# Altium PCB main.PcbDoc
Units mil, origin at the board's own origin, x right, y up, seen from the top; angles counter-clockwise.
Board outline 2345 x 2725 mil, 2 copper layers (Top Layer, Bottom Layer); 46 components, 39 nets, 214 pads, 106 vias.
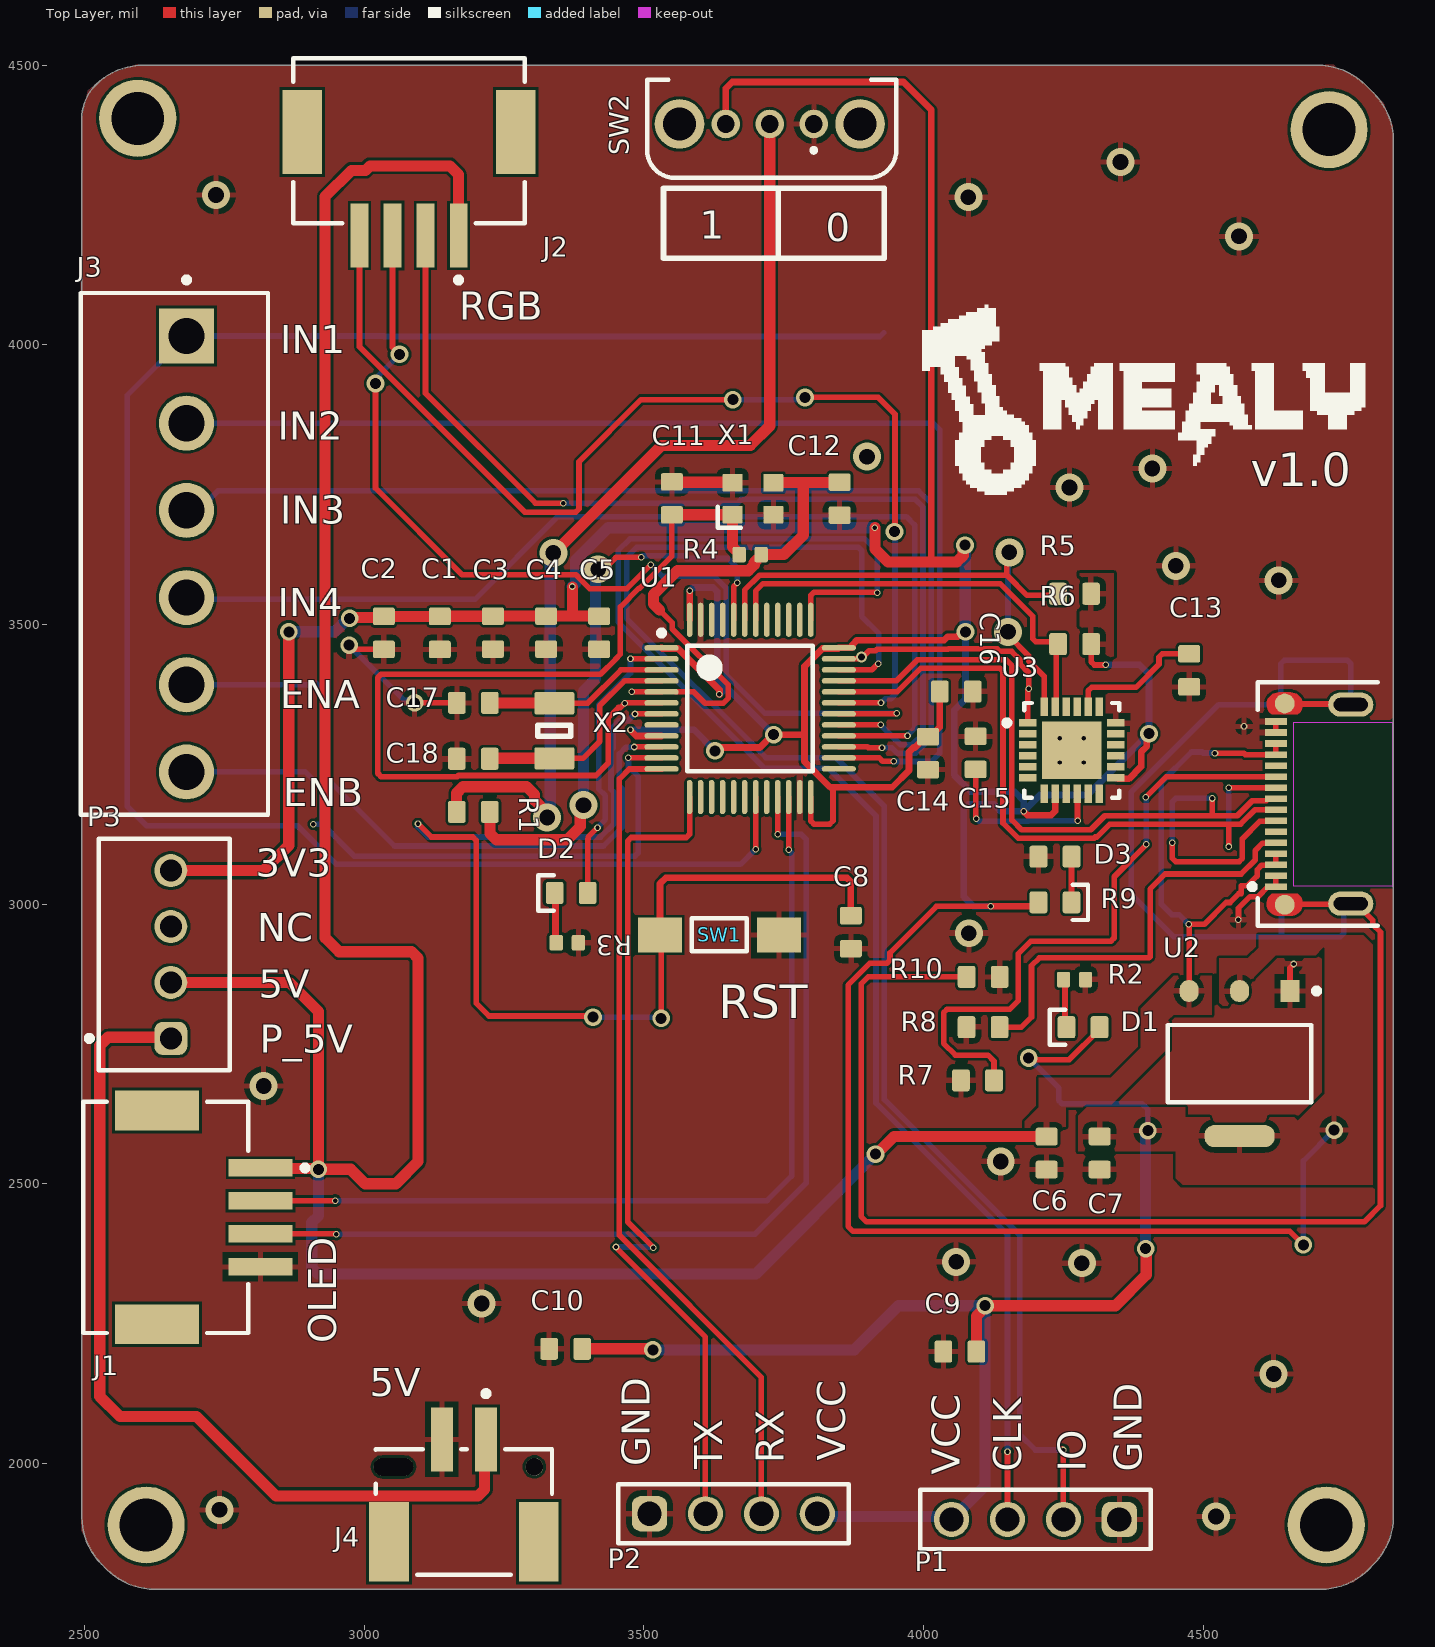
[diagram p0: Top Layer view]
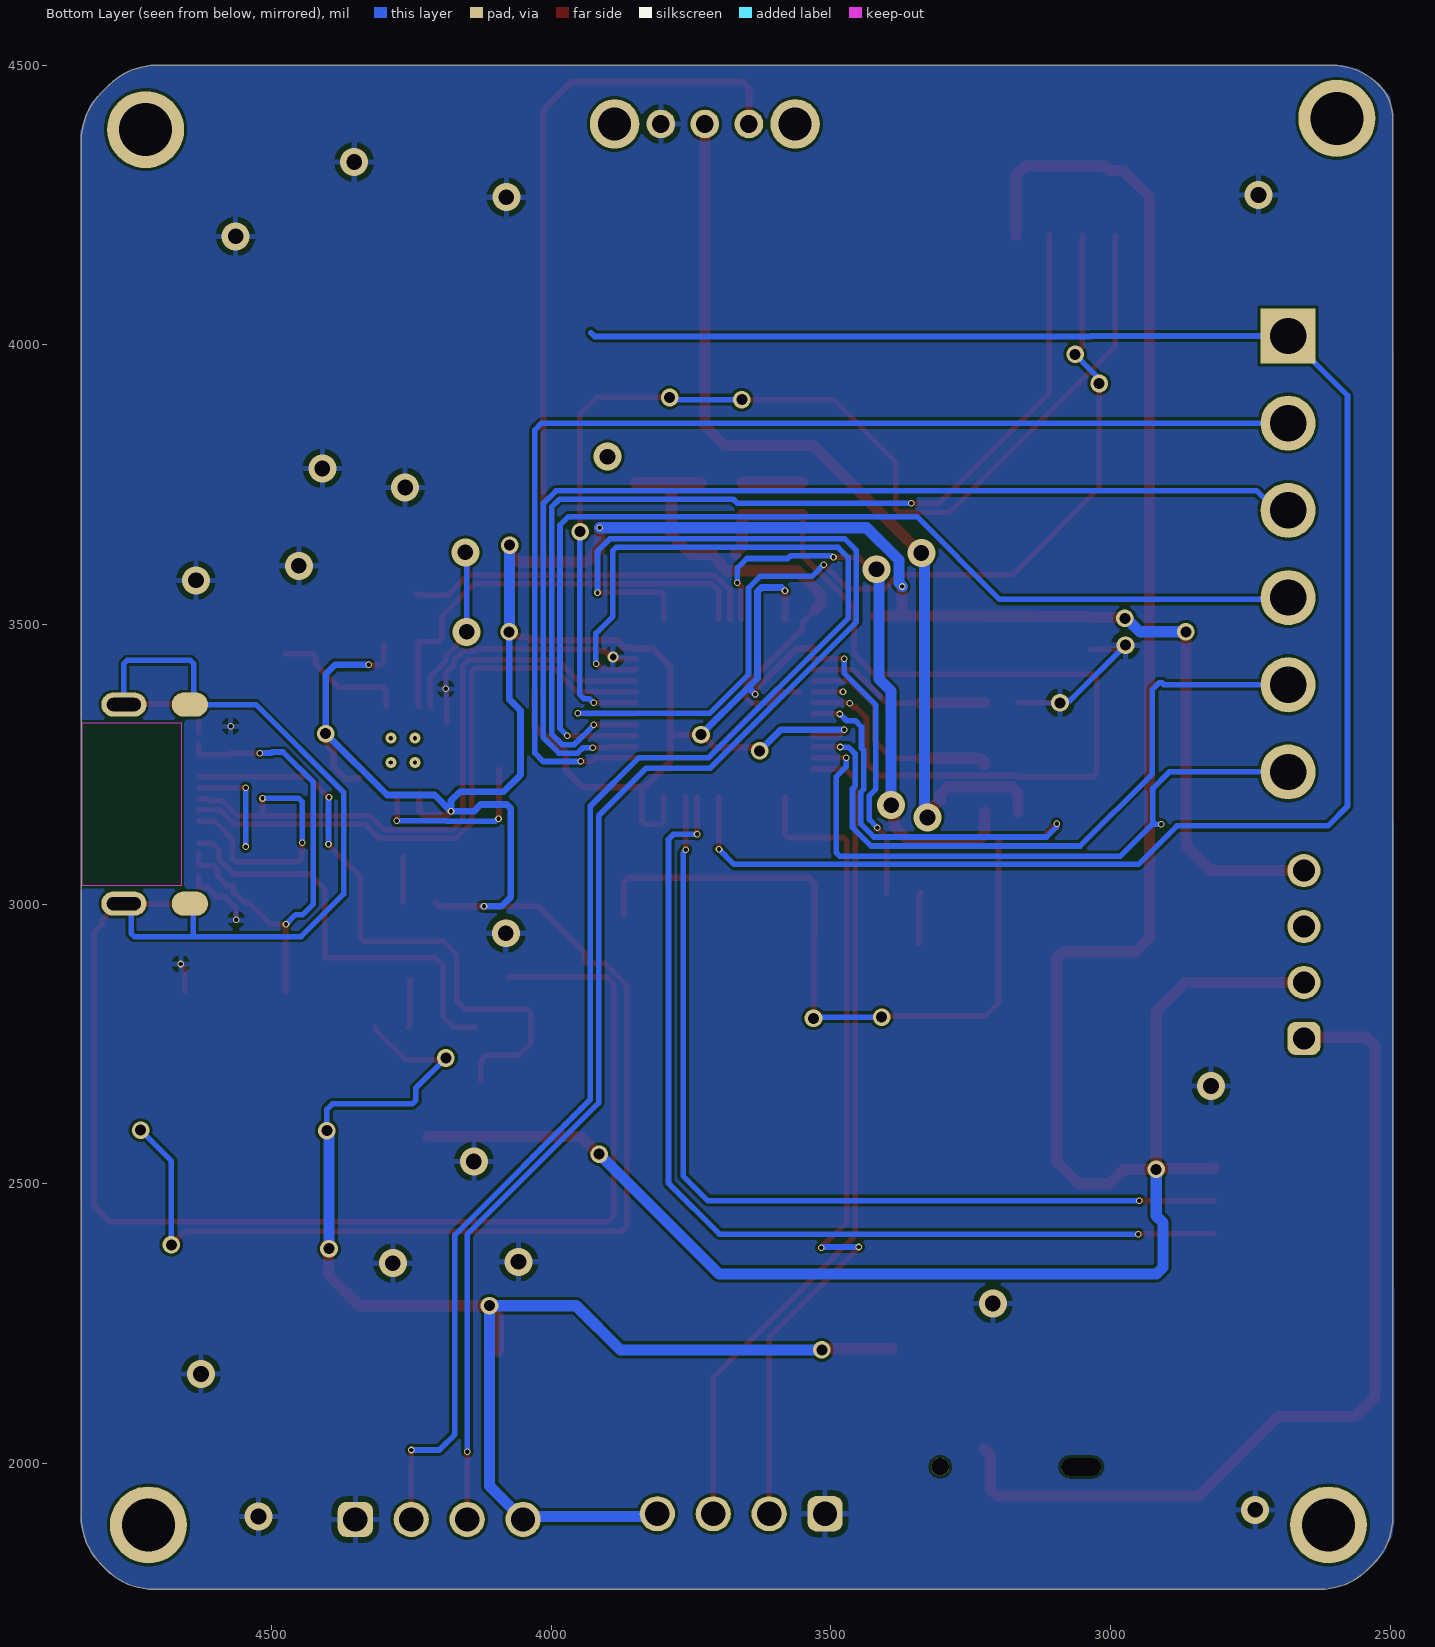
[diagram p1: Bottom Layer view, seen from below]
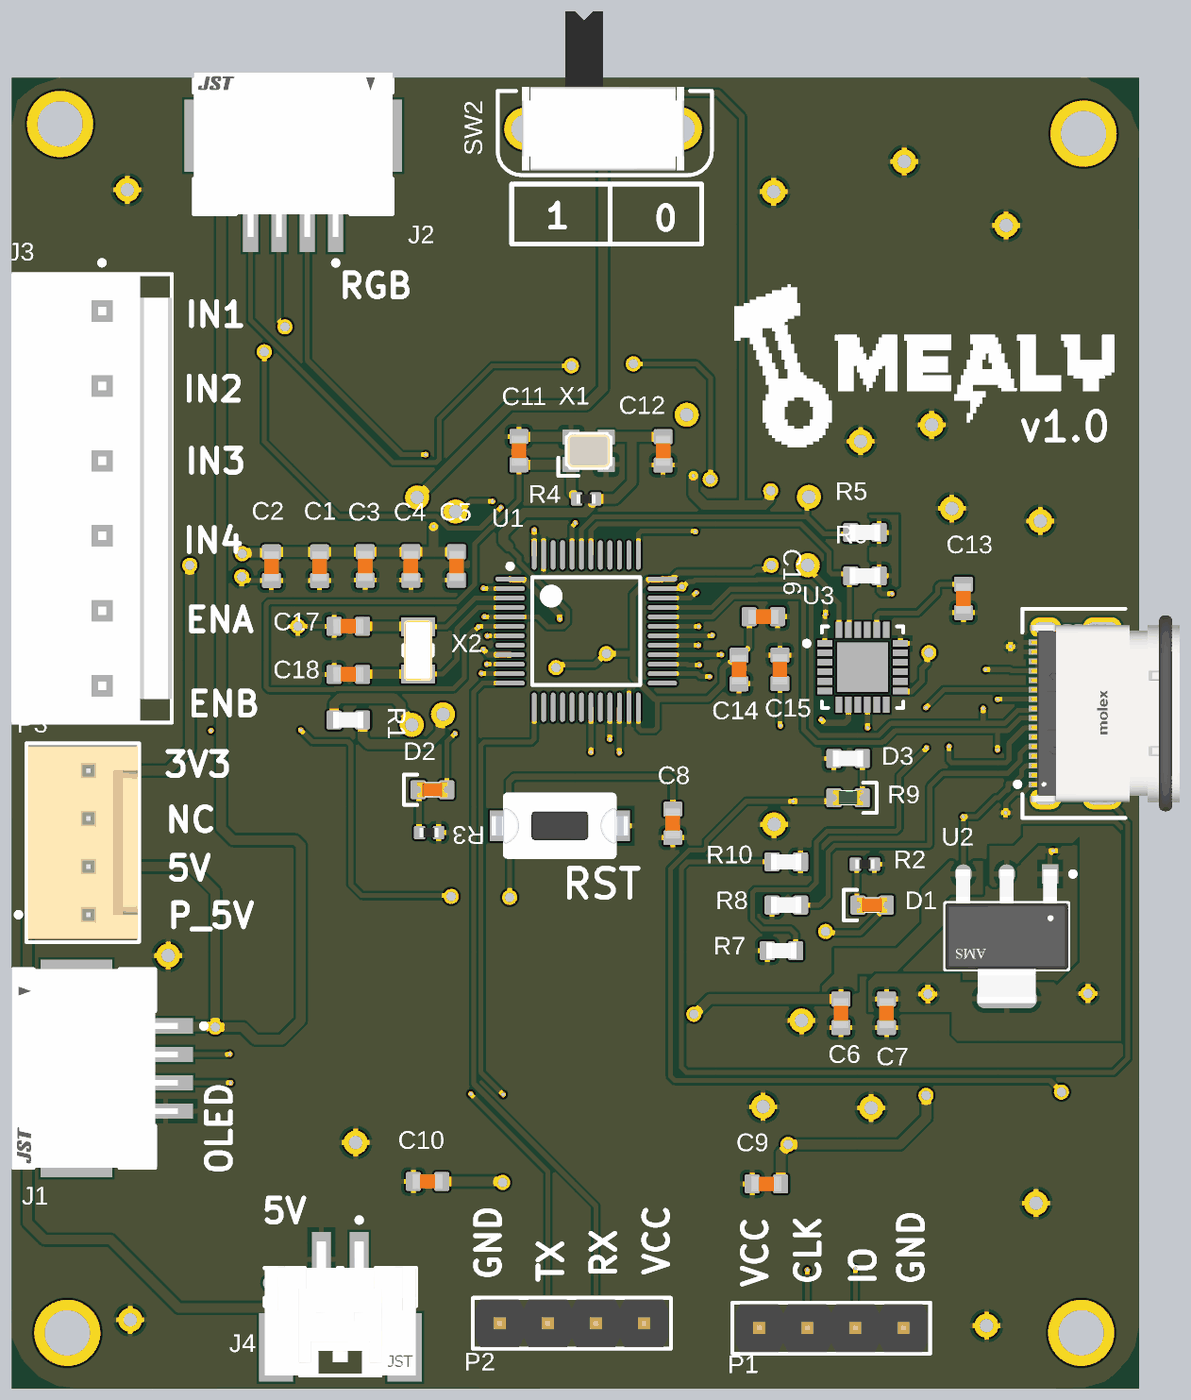
[diagram p2: 3D render of the assembled board from above, using the file's embedded part models]

## Layer stack, top to bottom
Top Solder: solder mask 0.4, Solder Resist, Dk 3.5
Top Layer: signal copper 1.4
Dielectric 1: dielectric 12.6, FR-4, Dk 4.8
Bottom Layer: signal copper 1.4
Bottom Solder: solder mask 0.4, Solder Resist, Dk 3.5

## Board outline
2530,1820 cw(c2614.5,1904.5) 2495,1904.5 2495,4404.64 cw(c2580.36,4404.64) 2520,4465 cw(c2604.5,4380.5) 2604.5,4500 4705,4500 cw(c4705,4379.29) 4790.36,4464.64 4804.64,4450.36 cw(c4719.29,4365) 4840,4365 4840,1905 cw(c4719.29,1905) 4804.64,1819.64 4795,1810 cw(c4710.5,1894.5) 4710.5,1775 2625,1775 cw(c2625,1895.71) 2539.64,1810.36

## Design rules (kind name [scope] priority, off if disabled: settings)
Clearance [All] p1: gap=5 ignorepadtopadclearanceinfootprint=FALSE
PolygonConnect [All] p1: connectstyle=Relief reliefconductorwidth=10 reliefentries=4 polygonreliefangle="90 Angle" airgapwidth=10
RoutingVias [All] p1: holewidth=19.68 width=31.5 viastyle="Through Hole" minholewidth=7.87 minwidth=11.81 maxholewidth=78.74 maxwidth=78.74
SolderMaskExpansion [All] p1: expansion=4 istentingtop=FALSE
Width power [All] p1: maxlimit=20 minlimit=10 preferedwidth=20 minimp=50.000000 maximp=50.000000 favimp=50.000000
Width [All] p2: maxlimit=10 minlimit=5 preferedwidth=10 minimp=50.000000 maximp=50.000000 favimp=50.000000
30 further rules are at their usual default settings.

## Components (designator, comment, footprint, x,y, rotation, side; value= is the part's Value field where it differs from the comment)
C1 "100nF" CAP_0603 3135,3485 r90 top
C2 "100nF" CAP_0603 3035,3485 r90 top
C3 "100nF" CAP_0603 3230,3485.47 r90 top
C4 "100nF" CAP_0603 3325,3485.47 r90 top
C5 "100nF" CAP_0603 3420,3485.47 r90 top
C6 "1uF" CAP_0603 4220,2555 r90 top
C7 "10uF" CAP_0603 4315,2555 r90 top
C8 "100nF" CAP_0603 3870,2950 r90 top
C9 "100nF" CAP_0603 4065,2200 r0 top
C10 "100nF" CAP_0603 3360,2205 r0 top
C11 "10pF" CAP_0603 3550,3725.47 r270 top
C12 "10pF" CAP_0603 3850,3725 r90 top
C13 "2200pF" CAP_0603 4475,3418 r90 top
C14 "0.01uF" CAP_0603 4008.08,3270 r90 top
C15 "0.1uF" CAP_0603 4093.08,3270.47 r270 top
C16 "0.1uF" CAP_0603 4058.55,3380 r180 top
C17 "10pF" CAP_0603 3195,3360 r0 top
C18 "10pF" CAP_0603 3195,3260 r0 top
D1 "RED" LED_0603_RED 4285,2780 r0 top
D2 "RED" LED_0603_RED 3370,3020 r0 top
D3 "GREEN" LED_0603_GREEN 4235,3003.14 r180 top
J1 "OLED" FP-SM04B-ZESS-TB_LF_SN-MFG 2645,2440 r270 top
J2 "RGB" FP-SM04B-ZESS-TB_LF_SN-MFG 3080,4365 r180 top
J3 "MOTOR_DRIVER" FP-B6P-VH_LF_SN-MFG 2660.54,3626.14 r270 top
J4 "POWER" FP-BM02B-PASS-1-TFT_LF_S-MFG 3178.14,1913.15 r0 top
P1 "61300411121" 61300411121 4200,1900 r180 top
P2 "61300411121" 61300411121 3660,1910 r0 top
P3 "61900411121" 61900411121 2642.19,2910 r270 top
R1 "100K" RES_0603 3195,3165 r180 top
R2 "R0402" RES_0402 4270,2865 r180 top
R3 "R0402" RES_0402 3363,2931 r180 top
R4 "1M" RES_0402 3690,3625 r180 top
R5 "4.7K" RES_0603 4270,3555 r0 top
R6 "4.7K" RES_0603 4270,3465 r0 top
R7 "5.1K" RES_0603 4096.38,2685 r0 top
R8 "5.1K" RES_0603 4106.38,2780 r0 top
R9 "4.7K" RES_0603 4235,3085 r0 top
R10 "1M" RES_0603 4106.38,2870 r180 top
SW1 "DTSM-3" DTSM-3 3635,2945 r180 top
SW2 "OS102011MA1QN1" OS102011MA1QN1 3725,4395 r180 top
U1 "STM32F103C8T6" STM-LQFP48_L 3690,3350 r0 top
U2 "AMS1117-3.3" FP-AMS1117-IPC_C 4565,2715 r270 top
U3 "MPU-6050" IS-QFN-24_V 4265,3275 r0 top
X1 "8MHz" XTAL_2520 3695,3725 r0 top
X2 "32.768k" XTAL_3215-2 3340,3310 r270 top
? "213083-0005" FP-2130830005-MFG 4769.76,3178.9 r90 top

## Footprints (in the part's own frame and the unit in brackets; to place one, negate y for a bottom-side part, rotate by r counter-clockwise, add the part's x,y. Pads: shape width x height; smd on the part's side, far side on the other; paste and mask are expansions set on the pad)
61300411121 [mm] "Pin Header, pitch 2.54 mm, THT, Vertical, single row, 4p"
  rrect50% 1.6x1.6 hole 1.1: 1(-3.81,0)
  round 1.6 hole 1.1: 2(-1.27,0) 3(1.27,0) 4(3.81,0)
  silkscreen extent -5.23,-1.35 5.23,1.35, body extent -5.08,-1.27 5.08,1.27, height 8.57
61900411121 [mm] "2.54mm Male Locking Header, 4p"
  rrect50% 1.5x1.5 hole 1: 1(3.81,0.3)
  round 1.5 hole 1: 2(1.27,0.3) 3(-1.27,0.3) 4(-3.81,0.3)
  silkscreen extent -5.25,-3.52 5.25,2.98, body extent -5.08,-2.9 5.08,2.9, height 11.53
CAP_0603 [mm]
  rrect25% 0.8x1 smd: 1(-0.75,0) 2(0.75,0)
  body extent -0.8,-0.4 0.8,0.4, height 0.51
DTSM-3 [mm]
  rect 2x1.6 smd: 1(-2.7,0) 2(2.7,0)
  silkscreen extent -1.25,-0.75 1.25,0.75, body extent -3.6,-1.75 3.6,1.75, height 4.96
FP-2130830005-MFG [mm]
  round 0.9 smd paste-1000 mask+0: 1(-4.57,3.15) 2(4.57,3.15)
  rrect100% 1.1x1.65 smd far side paste-1000 mask+0: 1(-4.52,3.15) 2(4.52,3.15)
  rrect100% 1.1x2.05 hole 1.55 slot 0.6 at 0 deg paste-1000 mask+0: 3(-4.52,0.15) 4(4.52,0.15)
  rect 0.3x1 smd paste+0 mask+0: A1(-3.75,3.55) A4(-2.75,3.55) A5(-1.75,3.55) A6(-0.75,3.55) A7(0.75,3.55) A8(1.75,3.55) A9(2.75,3.55) A12(3.75,3.55) B1(3.25,3.55) B4(2.25,3.55) B5(1.25,3.55) B6(0.25,3.55) B7(-0.25,3.55) B8(-1.25,3.55) B9(-2.25,3.55) B12(-3.25,3.55)
  Top Layer region: 5.07,3.425 5.001,3.691 4.812,3.891 4.549,3.974 4.28,3.919 4.07,3.741 4.07,3.741 4.07,2.559 4.28,2.381 4.549,2.326 4.812,2.409 5.001,2.609 5.07,2.875 5.07,2.875
  Top Layer region: -5.07,3.425 -5.001,3.691 -4.812,3.891 -4.549,3.974 -4.28,3.919 -4.07,3.741 -4.07,3.741 -4.07,2.559 -4.28,2.381 -4.549,2.326 -4.812,2.409 -5.001,2.609 -5.07,2.875 -5.07,2.875
  Keep-Out Layer region: -3.7,-1.745 3.7,-1.745 3.7,2.755 -3.7,2.755
  silkscreen extent -5.53,-1.07 5.53,4.75, body extent -5.33,-4.18 5.33,4.18, height 0.25
FP-AMS1117-IPC_C [mm]
  rect 1.004x0.872 smd paste+0 mask+0: 1(-3.295,2.29)
  rrect100% 1.004x0.872 smd paste+0 mask+0: 2(-3.295,0) 3(-3.295,-2.29)
  rrect87% 1.004x3.182 smd paste+0 mask+0: 4(3.295,0)
  silkscreen extent -3.42,-3.25 1.75,3.63, body extent -3.9,-3.35 3.9,3.35, height 0.25
FP-B6P-VH_LF_SN-MFG [mm]
  rect 2.5x2.5 hole 1.65 paste-1000 mask+0: 1(-9.9,0.55)
  round 2.5 hole 1.65 paste-1000 mask+0: 2(-5.94,0.55) 3(-1.98,0.55) 4(1.98,0.55) 5(5.94,0.55) 6(9.9,0.55)
  silkscreen extent -12.57,-4.25 11.85,4.25, body extent -11.95,-4.35 11.95,4.35, height 0.25
FP-BM02B-PASS-1-TFT_LF_S-MFG [mm]
  rect 1x2.9 smd paste+0 mask+0: 1(1,3.3) 2(-1,3.3)
  rect 1.8x3.6 smd paste+0 mask+0: 3(-3.4,-1.35) 4(3.4,-1.35)
  rrect100% 1.8x0.8 hole 0.8 slot 1.8 at 0 deg unplated paste-1000 mask+0: ""(-3.2,2.05)
  round 0.8 hole 0.8 unplated paste-1000 mask+0: ""(3.2,2.05)
  silkscreen extent -4,-2.85 4,5.5, body extent -4.4,-3.25 4.4,4.85, height 0.25
FP-SM04B-ZESS-TB_LF_SN-MFG [mm]
  rect 0.8x2.9 smd paste+0 mask+0: 1(-2.25,4.3) 2(-0.75,4.3) 3(0.75,4.3) 4(2.25,4.3)
  rect 1.8x3.8 smd paste+0 mask+0: 5(-4.85,-0.4) 6(4.85,-0.4)
  silkscreen extent -5.25,-3.75 5.25,6.45, body extent -5.85,-3.85 5.85,5.85, height 0.25
IS-QFN-24_V [mm] "QFN, 24-Leads, Body 4x4mm, Pitch 0.5mm, Thermal Pad 2.7x2.6mm"
  rect 0.8x0.35 smd: 1(-2,1.25) 2(-2,0.75) 3(-2,0.25) 4(-2,-0.25) 5(-2,-0.75) 6(-2,-1.25) 13(2,-1.25) 14(2,-0.75) 15(2,-0.25) 16(2,0.25) 17(2,0.75) 18(2,1.25)
  rect 0.35x0.85 smd mask+0.102: 7(-1.25,-1.975) 8(-0.75,-1.975) 9(-0.25,-1.975) 10(0.25,-1.975) 11(0.75,-1.975) 12(1.25,-1.975) 19(1.25,1.975) 20(0.75,1.975) 21(0.25,1.975) 22(-0.25,1.975) 23(-0.75,1.975) 24(-1.25,1.975)
  rect 2.7x2.6 smd: 25(0,0)
  silkscreen extent -3.07,-2.15 2.15,2.15, body extent -2,-2 2,2, height 0.95
LED_0603_GREEN [mm]
  rrect25% 0.8x1 smd: A(0.75,0) K(-0.75,0)
  silkscreen extent -1.5,-0.8 -0.8,0.8, body extent -0.8,-0.4 0.8,0.4, height 0.6
LED_0603_RED [mm]
  rrect25% 0.8x1 smd: A(0.75,0) K(-0.75,0)
  silkscreen extent -1.5,-0.8 -0.8,0.8, body extent -0.8,-0.4 0.8,0.4, height 0.6
OS102011MA1QN1 [mm]
  round 1.3 hole 0.8: 1(-2,0) 2(0,0) 3(2,0)
  round 2.25 hole 1.5: MH(-4.1,0) MH(4.1,0)
  silkscreen extent -5.75,-2 5.57,2.45, body extent -4.3,-6.22 4.3,2.18, height 4.59
RES_0402 [mm]
  rrect25% 0.6x0.7 smd: 1(-0.5,0) 2(0.5,0)
  body extent -0.5,-0.25 0.5,0.25, height 0.3
RES_0603 [mm]
  rrect25% 0.8x1 smd: 1(-0.75,0) 2(0.75,0)
  body extent -0.8,-0.43 0.8,0.43, height 0.52
STM-LQFP48_L [mm] "QFP, 48-Leads, Body 7x7mm, Pitch 0.5mm, IPC High Density"
  oval 1.55x0.25 smd: 1(-4.025,2.75) 2(-4.025,2.25) 3(-4.025,1.75) 4(-4.025,1.25) 5(-4.025,0.75) 6(-4.025,0.25) 7(-4.025,-0.25) 9(-4.025,-1.25) 10(-4.025,-1.75) 11(-4.025,-2.25) 12(-4.025,-2.75) 25(4.025,-2.75) 26(4.025,-2.25) 27(4.025,-1.75) 28(4.025,-1.25) 29(4.025,-0.75) 30(4.025,-0.25) 31(4.025,0.25) 32(4.025,0.75) 33(4.025,1.25) 34(4.025,1.75) 35(4.025,2.25) 36(4.025,2.75) ""(-4.025,-0.75)
  oval 0.25x1.55 smd: 13(-2.75,-4.025) 14(-2.25,-4.025) 15(-1.75,-4.025) 16(-1.25,-4.025) 17(-0.75,-4.025) 18(-0.25,-4.025) 19(0.25,-4.025) 20(0.75,-4.025) 21(1.25,-4.025) 22(1.75,-4.025) 23(2.25,-4.025) 24(2.75,-4.025) 37(2.75,4.025) 38(2.25,4.025) 39(1.75,4.025) 40(1.25,4.025) 41(0.75,4.025) 42(0.25,4.025) 43(-0.25,4.025) 44(-0.75,4.025) 45(-1.25,4.025) 46(-1.75,4.025) 47(-2.25,4.025) 48(-2.75,4.025)
  silkscreen extent -4.15,-2.85 2.85,3.55, body extent -3.5,-3.5 3.5,3.5, height 1.6
XTAL_2520 [mm]
  rrect10% 0.9x0.8 smd mask+0: 1(-0.925,-0.725) 2(0.925,-0.725) 3(0.925,0.725) 4(-0.925,0.725)
  silkscreen extent -1.6,-1.33 -0.54,-0.36, body extent -1.25,-1 1.25,1, height 0.8
XTAL_3215-2 [mm]
  rrect10% 1x1.8 smd: 1(-1.25,0) 2(1.25,0)
  silkscreen extent -0.25,-0.75 0.25,0.75, body extent -1.6,-0.75 1.6,0.75, height 0.91

## Part data
C1 C2 C3 C4 C5 C6 C7 C8 C9 C10 C11 C12 C13 C14 C15 C16 C17 C18: library part CAP_0603, "Capacitor SMD 0603"
D1 D2: library part LED_0603_RED, "LED 0603 RED SMD"
D3: library part LED_0603_GREEN, "LED 0603 GREEN SMD"
J1 J2: library part CMP-17439-000309-1, "CONN HEADER SMD R/A 4POS 1.5MM", Color=Natural, Flammability Rating="UL94 V-0", Max Operating Temperature=85°C, Min Operating Temperature=-25°C, Voltage Rating=100V, Connector Type=Header, Contact Finish - Mating=TIN, Contact Material="Copper Alloy", Contact Plating=Tin, Contact Shape=Rectangular, Contact Type="Outer Shroud Contact", Fastening Type=Ramp, Gender=Male, Insulation Color=Natural, Insulation Material=Nylon, Lead Free="Lead Free", Mount="Surface Mount", Number of Contacts=4, Number of Positions=4, Number of Rows=1, Packaging="Cut Tape", Pitch=0.059inch, REACH SVHC="No SVHC", Series=ZE, Termination=Solder
J3: library part CMP-17439-000380-1, "CONN HEADER VERT 6POS 3.96MM", Color=Natural, Contact Resistance=20mR, Current Rating=10A, Flammability Rating="UL94 V-0", Housing Color=White, Max Operating Temperature=85°C, Max Voltage Rating (AC)=250V, Min Operating Temperature=-25°C, Connector Type=Header, Contact Finish - Mating=TIN, Contact Material=Brass, Contact Mating Length=0.303inch, Contact Plating=Copper, Contact Shape=Square, Contact Type="Male Pin", Depth=8.5mm, Fastening Type=Ramp, Gender=Male, Height=8.5mm, Housing Material=Polyamide, Insulation Color=Natural, Insulation Material=Nylon, Lead Free="Lead Free", Length=23.7mm, Mated Stacking Heights=16.5mm, Max Current Rating=10A, Mount="Through Hole", Number of Contacts=6, Number of Pins=6, Number of Positions=6, Number of Rows=1, Orientation=Straight, Packaging=Bulk, Pitch=3.96mm, REACH SVHC="No SVHC", Series=VH, Termination=Solder, Voltage Rating=250V, Width=14.6mm
J4: library part CMP-17439-000073-1, "CONN HEADER SMD 2POS 2MM", Color=Natural, Connector Type="Male Pin", Contact Material=Copper, Contact Plating=Tin, Contact Type="Male Pin", Fastening Type=Ramp, Gender=Male, Lead Free="Lead Free", Mount="Surface Mount", Number of Contacts=2, Number of Positions=2, Number of Rows=1, Packaging="Tape and Reel", Pitch=0.079inch, Series=PA, Termination=Solder
P1 P2: library part CMP-1502-01064-2, Color=Black, Contact Resistance=20mΩ, Current Rating=3A, Max Operating Temperature=105°C, Min Operating Temperature=-40°C, Operating Supply Voltage=250V, Connector Type="Male Pin", Contact Material=Copper, Contact Mating Length=5.9944mm, Contact Plating=Gold, Gender=Male, Height=8.89mm, Lead Free="Lead Free", Lead Pitch=2.54mm, Mount="Through Hole", NexarPartId=32855522, Number of Contacts=4, Number of Pins=4, Number of Positions=4, Number of Rows=1, Orientation=Vertical, Packaging=Bulk, Pitch=2.54mm, REACH SVHC=Unknown, RoHS=Compliant, Termination=Solder, Voltage Rating=250V
P3: library part CMP-1502-00586-2, Color=Beige, Contact Resistance=20mΩ, Current Rating=3A, Flammability Rating="UL94 V-0", Insulation Resistance=1GΩ, Max Operating Temperature=105°C, Min Operating Temperature=-40°C, Operating Supply Voltage=250V, Connector Type="Male Pin", Contact Gender=Male, Contact Material=Copper, Contact Mating Length=7.493mm, Contact Plating=Tin, Fastening Type=Friction, Gender=Male, Height=3.3mm, Housing Material=Nylon, Insulation=Insulated, Lead Free="Lead Free", Lead Pitch=2.54mm, Length=10.16mm, Mount="Through Hole", NexarPartId=18818226, Number of Contacts=4, Number of Pins=4, Number of Positions=4, Number of Rows=1, Orientation=Vertical, Packaging=Bulk, Pitch=2.54mm, REACH SVHC=Unknown, RoHS=Compliant, Termination="Through Hole", Voltage Rating=250V, Width=10.2mm
R1 R5 R6 R7 R8 R9 R10: library part RES_0603, "Resistor SMD 0603"
R2 R3 R4: library part RES_0402, "Resistor SMD 0402"
SW1: "Tactile Switch SMD SPST", Manufacturer=Diptronics, Manufacturer Part Number=DTSM-3
SW2: "Slide Switch SPDT Horizontal THT", Manufacturer=C&K, Manufacturer Part Number=OS102011MA1QN1
U1: library part CMP-0237-00215-3, "ARM Cortex-M3 32-bit MCU, 64 KB Flash, 20 KB Internal RAM, 37 I/Os, 48-pin LQFP, -40 to 85 degC, Tray", I/Os (High Current)=37, Operating Frequency(F) (Processor speed) (MHz)=72, Supply Voltage(Vcc) min (V)=2, A/D Converter="2x12-bit (10 Channel)", ComponentLink1Description="Manufacturer URL", ComponentLink1URL=http://www.st.com/web/en/home.html, ComponentLink2Description=Datasheet, ComponentLink2URL=http://www.st.com/st-web-ui/static/active/en/resource/technical/document/datasheet/CD00161566.pdf, ComponentLink3Description="Package Specification", ComponentLink3URL=http://www.st.com/st-web-ui/static/active/en/resource/technical/document/datasheet/DM00058181.pdf, Core="ARM Cortex-M3", DatasheetVersion="Rev. 16", FLASH Size (Prog) (kB)=64, Internal RAM Size (kB)=20, Mounting Technology="Surface Mount", PackageDescription="48-Pin Low Profile Quad Flat Package, 7 x 7 mm Body, 0.5 mm Pitch", PackageReference=LQFP48, PackageVersion="Rev. 6, 06/2013", Packing=Tray, PartNumber=STM32F103C8T6
U2: library part CMP-209535-000001-1, "LDO Voltage Regulators 1A, 3.3V", Dropout Voltage=1.1V, Manufacturer="Advanced Monolithic Systems", Max Junction Temp=+125°C, Max Power Dissipation=1.2W, Max Supply Voltage=15V, Nominal Supply Current=5mA, Output Current=1A, Output Voltage=3.3V, Package=AMS1117, Temperature="-40°C to +125°C", Temperature Range Low=-40°C, Automotive=No, Category=IC, ComponentLink2Description=Datasheet, ComponentLink2URL=http://www.advanced-monolithic.com/pdf/ds1117.pdf, Device Class L1="Integrated Circuits (ICs)", Device Class L2="Power Management ICs", Device Class L3="Voltage Regulators - Linear", Height=1.8mm, Ipc Land Pattern Name=SOT229P700X180-4, Lead Free=Yes, Manufacturer Part Number=AMS1117-3.3, Number Of Outputs=1, Octopart=https://octopart.com/ams1117-3.3-advanced+monolithic+systems-25899300, Output Type=Fixed, RoHS=TRUE, Standoff Height=0.64mm, Temperature Range High=+125°C
U3: library part CMP-1753-00002-2, "3-Axis Gyroscope, Accelerometer and a Digital Motion Processor(TM) (DMP), 2.375 to 3.46 V, -40 to 85 degC, 24-Pin QFN, RoHS, Tape and Reel", Manufacturer=InvenSense, Standard Package=5,000, Category=Sensors,Transducers, Datasheet URL=http://datasheet.octopart.com/MPU-6050-InvenSense-datasheet-14421344.pdf, Datasheet Version="Rev. 3.3, 05/2012", Dynamic Catalog=MPU-6000™Series, Family=Multifunction, Featured Product=MPU-60506-Axis,IntegratedI²CSolution, Manufacturer URL=http://www.invensense.com/, Online Catalog=MPU-6000™Series, Other Names="1428-1007-2 / MPU6050", Output Type=Digital, Sensor Type=MotionTracking, Unit PriceUSD=Digital
X1: library part XTAL_2520, "Crystal SMD 2520"
X2: library part XTAL_3215, "Crystal SMD 3215"
?: library part CMP-04767-000030-2, "CONN RCP USB2.0 TYP C 24P SMD RA", Current Rating=5A, Max Operating Temperature=85°C, Min Operating Temperature=-40°C, Voltage Rating=30V, Contact Material="Gold, Nickel", Country of Origin=CN, Gender=Receptacle, NexarPartId=114105384, Number of Contacts=16, Schedule B="8536695050, 8536695050", USB Standard="USB 2.0"

## Free pads (board coordinates)
  round 137.8 hole 94.49: 1(2595,4405) 2(4725,4385) 3(4720,1890) 4(2610,1890)

## Via types
v1: diameter 11.81, hole 7.87, Top Layer to Bottom Layer, 52 vias
v2: diameter 31.5, hole 19.68, Top Layer to Bottom Layer, 25 vias
v3: diameter 50, hole 28, Top Layer to Bottom Layer, 24 vias
v4: diameter 19.68, hole 7.87, Top Layer to Bottom Layer, 4 vias
v5: diameter 19.68, hole 11.81, Top Layer to Bottom Layer, 1 vias

## Nets (pads, with @x,y where several pads share a name; then routed paths per layer and width w, separated by ;. In a path a pad name is that pad's centre, name@x,y a point inside that pad or via, vN(x,y) a via of type N, cw(c..) or ccw(c..) an arc to the next point about the centre after c; other vN are vias at no path point)
3V3: C1.2 C2.2 C3.2 C4.2 C5.2 C7.2 C9.2 C10.2 C14.2 C16.2 D1.A D3.A P1.4 P2.4 P3.4 R5.2 R6.2 SW2.3 U1.1 U1.9 U1.24 U1.36 U1.48 U2.2 U2.4 U3.8 U3.13 | length 11418.8
  Top Layer w10: P3.4 P3.4@2662,3068 ; v2@2861,3483 v2(2865,3487) ; U1.24 3798.27,3148.86 3804.13,3143 3832.14,3143 3838,3148.86 3838,3204 3843,3209 ; v1(4120,2996) 4023,2996 3940,2913 3940,2899.86 3934.14,2894 3903.69,2894 3865,2855.31 3865,2424 3874,2415 4655,2415 v2(4679,2391) ; v2(4188,2725) 4191,2722 4260.46,2722 4314.53,2776.06 D1.A ; R6.2 4299.53,3433.51 4305.39,3427.65 4325.65,3427.65 v1(4326,3428) ; v2(4734,2596) 4734,2593 v2@4736,2591
  Top Layer w12: v1@3476,3311 3486.21,3300.79 U1.9 ; U1.1 3532.61,3457.19 3561.04,3457.19 3635,3383.22 v1(3635,3375) ; U1.48 v1(3581.73,3560.22) ; v2(3627,3274) 3633,3280 3707.27,3280 3730.27,3303 v2(3732,3303) 3786,3303 3787,3304 ; SW2.3 3646.26,4458.26 3658,4470 3964,4470 4014,4420 4014,3612 4014,3611 ; C16.2 4029.03,3316.54 4012.02,3299.53 C14.2 4004.14,3299.53 3984.62,3280 3982,3280 3974,3272 3974,3239 3944,3209 3843,3209 3833,3209 3787,3255 3787,3304 ; v2(4075,3487) 4069.72,3487 4060.99,3478.27 4043.27,3478.27 4037,3472 3881.08,3472 3872.98,3463.89 3872.98,3459.35 3871.9,3458.27 U1.36 3847.39,3457.19 3818.96,3457.19 3787,3425.22 3787,3304 ; v1(4120,2996) 4198.33,2996 D3.A ; v1(4179,3166) 4186,3159 4228,3159 4235.47,3166.47 U3.8 ; U3.13 4345.21,3225.79 4347,3224 4367,3224 4389,3246 4389,3272 4399.27,3282.27 4399.27,3301.27 v2(4403,3305)
  Top Layer w20: P3.4 2820,3060 2865,3105 v2(2865,3487) ; v2(2974,3511) 2975.76,3512.76 3033.24,3512.76 C2.2 C1.2 3135.24,3514.76 3229.76,3514.76 C3.2 C4.2 3372.5,3515 ; v1@3372.5,3566.5 3372.5,3515 ; C10.2 3514,2205 v2(3516,2203) ; C5.2 3372.5,3515 ; v1(3913,3673) 3913,3635.26 3936.26,3612 4014,3612 4059.28,3612 4071,3623.72 4071,3635.89 4074,3638.89 v2(4074,3642) ; C9.2 4094.53,2263.42 4110,2278.89 v2(4110,2282) 4343,2282 4398,2337 4398,2383 v2(4397,2384)
  Bottom Layer w10: v2(4188,2725) 4242,2671 4242,2648.86 4247.86,2643 4391,2643 4401,2633 v2(4401,2595) ; v2(4679,2391) 4679,2541 v2(4734,2596)
  Bottom Layer w12: v1(3476,3312) 3589,3312 v2(3627,3274) ; v1(3581.73,3560.22) 3587.51,3566 3623.97,3566 3631,3558.97 3631,3404 3646.5,3388.5 ; v1(3635,3375) 3646.5,3386.5 3646.5,3388.5 ; v2(3732,3303) 3646.5,3388.5 ; v2(4075,3487) 4075,3366.61 4054.75,3346.36 4054.75,3231.25 4085,3201 4163,3201 4179,3185 v1(4179,3166) ; v1@4122,2996 v1(4120,2996) 4089,2996 4072,3013 4072,3170.97 4079.03,3178 4126,3178 4138,3166 v1(4179,3166) ; v1(4326,3428) 4386,3428 4403,3411 v2(4403,3305) 4293,3195 4208,3195 v1(4179,3166)
  Bottom Layer w20: v2(2865,3487) 2946.89,3487 2970.89,3511 v2(2974,3511) ; v1(3372,3568) 3378.12,3574.12 3378.12,3615.35 3435.77,3673 v1(3913,3673) ; v2(3516,2203) 3876,2203 3955,2282 v2(4110,2282) 4110,1960 P1.4 4045,1905 3815,1905 P2.4 ; v2(4074,3642) 4074.5,3641.5 4074.5,3487.5 v2(4075,3487) ; v2(4397,2384) 4397,2587.89 4401,2591.89 v2(4401,2595)
5V: ?.A4 ?.A9 ?.B4 ?.B9 C6.2 J1.1 J2.1 P3.2 U2.3 | length 5609.6
  Top Layer w10: U2.3 4474.84,2962.67 4474,2963.51 v1(4474,2964) 4502,2964 4541,3003 4548,3003 4564,3019 4568,3019 4568,3033 4579,3033 4596.36,3050.36 4596.36,3061.36 4604.72,3069.72 4629.09,3069.72 ?.A4 ?.B9 ; v1(4521,3270) 4572.49,3270 4575.01,3267.48 ?.B4 ?.A9
  Top Layer w20: P3.2 2866,2860 2918,2808 v2(2918,2526) ; J1.1 2815.58,2527.29 2916.71,2527.29 v2(2918,2526) ; J2.1 3168.58,4304.42 3153,4320 3010,4320 3002,4312 2977,4312 2930,4265 2930,2940 2955,2915 3084.28,2915 3096,2903.28 3096,2539.72 3056.28,2500 3001.7,2500 2975.7,2526 v2(2918,2526) ; v2(3914,2553) 3915.64,2553 3947.17,2584.53 C6.2
  Bottom Layer w10: v1(4474,2964) 4456.83,2981.17 4443.83,2981.17 4425,3000 4425,3218 4479,3272 4498.51,3272 4500.16,3270.35 4520.65,3270.35 v1(4521,3270)
  Bottom Layer w20: v2(2918,2526) 2918,2442.8 2906,2430.8 2906,2350.72 2917.72,2339 3700,2339 v2(3914,2553)
BLUE: J2.4 U1.31 | length 2034.4
  Top Layer w10: J2.4 2991.42,3996.58 3287,3701 3378.14,3701 3384,3706.86 3384,3791 3495,3902 v2(3659,3902) ; v2(3788,3906) 3919,3906 3949,3876 3949,3667 v2(3948,3666) ; U1.31 v1(3923.84,3359.84)
  Bottom Layer w10: v2(3659,3902) 3784,3902 v2(3788,3906) ; v1(3923.84,3359.84) 3924.33,3359.84 3931.75,3367.26 3941.26,3367.26 3949,3375 3949,3665 v2(3948,3666)
BOOT0: R1.1 U1.44 | length 1050.9
  Top Layer w10: v3(3418.12,3598.78) 3428.94,3598.78 3450.16,3620 v1(3495,3620) ; U1.44 3660.47,3567.98 3667,3574.51 v1(3667,3575)
  Top Layer w20: R1.1 3224.53,3126.72 3236.24,3115 3362.08,3115 3386.26,3139.18 3386.26,3171.26 v3(3392,3177)
  Bottom Layer w10: v1(3495,3620) 3498,3623 3571.5,3623 3576.5,3618 3650,3618 3667,3601 v1(3667,3575)
  Bottom Layer w20: v3(3392,3177) 3392,3380.88 3413.5,3402.38 3413.5,3594.17 v3(3418.12,3598.78)
DEBUG_RX: P2.3 U1.12 | length 1502.1
  Top Layer w10: U1.12 3473.73,3241.73 3456,3224 3456,2408 3710,2154 P2.3
DEBUG_TX: P2.2 U1.13 | length 1539.4
  Top Layer w10: v1@3449,2387 3610,2226 P2.2 ; v1(3517,2386) 3471,2432 3471,3113 3477.11,3119.11 3575.87,3119.11 3581.73,3124.96 U1.13
  Bottom Layer w10: v1(3450,2387) 3515.51,2387 3516.51,2386 v1(3517,2386)
ENA: J3.5 U1.10 | length 1215.3
  Top Layer w10: v1@3485,3281.1 U1.10
  Bottom Layer w10: J3.5 2904.28,3392.28 2907.86,3395.86 2912.91,3395.86 2925,3383.77 2925,3233 3054,3104 3427.8,3104 3461,3137.2 3461,3206.43 3456.09,3211.33 3456.09,3268.59 3468.16,3280.65 3482.65,3280.65 v1(3483,3281)
ENB: J3.6 U1.11 | length 1157.6
  Top Layer w10: v1@3475.42,3261.42 U1.11
  Bottom Layer w10: J3.6 2894.62,3236.38 2924,3207 2924,3143 v1(2909.09,3143) ; 2925,3143 2982,3086 3484.14,3086 3490,3091.86 3490,3228 3472.35,3245.65 3472.35,3261.65 v1(3472,3262)
GND: ?.A1 ?.A12 ?.B1 ?.B12 C1.1 C2.1 C3.1 C4.1 C5.1 C6.1 C7.1 C8.1 C9.1 C10.1 C11.1 C12.1 C13.1 C14.1 C15.1 C16.1 C17.1 C18.1 J1.4 J4.2 P1.1 P2.1 R2.1 R3.1 R7.1 R8.1 R9.1 R10.1 SW1.1 SW2.1 U1.23 U1.35 U1.47 U2.1 U3.1 U3.18 X1.2 X1.4 | length 1061.7
  Top Layer w10: v2(2973,3463) 2980.53,3455.47 C2.1 ; v2(3090,3360) C17.1 ; U1.35 3848.54,3438.66 3883.04,3438.66 3886.38,3442 v5(3889,3442) 3891.62,3442 3902.62,3453 3914,3453 3917,3456 4043.63,3456 4044.63,3457 4131.5,3457 4136.5,3452 4157.54,3452 4173,3436.54 4173,3428.79 4188,3413.79 v1(4188,3385) 4188,3384.51 4186.26,3382.77 U3.1 ; v1(4563,2972) 4563.12,2972.12 4563.12,2992.91 4583.64,3013.43 4598.39,3013.43 4615.31,3030.35 4629.09,3030.35 ?.A1 ?.B12 ; ?.B1 ?.A12 ; U2.1 4655.16,2886.16 v1@4660,2891
  Top Layer w20: C11.1 3550.73,3754.27 3657.85,3754.27 X1.4
  Bottom Layer w10: v2(2973,3463) 3071.89,3364.11 3085.89,3364.11 v2(3090,3360) v2@3091,3360
  other v1: 4662,2893 4573,3318
  other v3: 4523,1905 2741,1917 4626,2160 3210,2286 4283,2358 4058.19,2360.55 4138,2540 2820,2675 4081,2948 4635,3579 4451,3605 4261,3745 4409,3779 4564,4194 4080,4264 2735,4268 4352,4327
GREEN: J2.3 U1.30 | length 1804.2
  Top Layer w10: v2(3020,3931) 3020,3744 3175,3589 3378.28,3589 3403.5,3563.78 3469.11,3563.78 v1(3512.41,3607.09) ; J2.3 3050.47,3995.53 v2(3063,3983) ; U1.30 3950.67,3340.16 3951.51,3341 v1(3952,3341)
  Bottom Layer w10: v2(3020,3931) 3020,3940 v2(3063,3983) ; v1(3512.41,3607.09) 3533.33,3586.17 3626.43,3586.17 3647,3565.6 3647,3410.63 3716.63,3341 v1(3952,3341)
HSE_IN: C12.2 R4.1 U1.5 X1.3 | length 931
  Top Layer w10: v1(3478,3380) 3478.47,3379.53 U1.5 ; 3528,3526 3550.5,3503.5 3550.5,3492.5 3651,3392 3651,3368.37 3641.63,3359 3609.6,3359 3589.07,3379.53 U1.5@3557.05,3379.53
  Top Layer w20: 3528,3526 3517.28,3536.72 3517.28,3553.28 3560.22,3596.22 3686.61,3596.22 3697.13,3606.74 3697.13,3610.47 3709.68,3623.03 R4.1 3750,3625 3785,3660 3785,3748.33 3790.71,3754.04 ; X1.3 3731.91,3754.04 3790.71,3754.04 ; C12.2 3849.51,3754.04 3790.71,3754.04
HSE_OUT: C11.2 R4.2 U1.6 X1.1 | length 1707
  Top Layer w10: U1.6 3467.24,3359.84 3466.4,3359 v1(3465.91,3359) 3465.42,3359 3458,3351.58 3454.58,3351.58 3436,3333 3436,3252 3414,3230 3168.43,3230 3166.57,3228.14 3029.86,3228.14 3024,3234 3024,3405.14 3029.86,3411 3422.32,3411 3449.76,3438.44 3449.76,3438.76 3458,3447 3458,3531.46 3491.54,3565 3492.82,3565 3550,3622.18 C11.2
  Top Layer w20: C11.2 3550.26,3696.2 3658.33,3696.2 3658.33,3638.96 3670.31,3626.97 R4.2
IN1: J3.1 U1.19 | length 3406.5
  Top Layer w10: v1(3699.84,3098.16) U1.19
  Bottom Layer w10: v1(3699.84,3098.16) 3672.68,3071 2950,3071 2881,3140 2611,3140 2576,3175 2576,3909.71 J3.1 3034.6,4015.91 3035.51,4015 3922,4015 3929,4022
IN2: J3.2 U1.26 | length 2119.2
  Top Layer w10: U1.26 3921.09,3261.42 3926.92,3255.59 3946.45,3255.59 v1(3946.8,3255.24)
  Bottom Layer w10: J3.2 4017,3860 4029,3848 4029,3270 4014,3255 3947.04,3255 v1(3946.8,3255.24)
IN3: J3.3 U1.27 | length 1955.6
  Top Layer w10: U1.27 3899.74,3281.1 3901.2,3279.65 v1(3925.65,3279.65)
  Bottom Layer w10: J3.3 2703.19,3704.09 2738.1,3739 3991.21,3739 4014,3716.21 4014,3298.01 3985.99,3270 3952.73,3270 3943.43,3279.3 3925.99,3279.3 v1(3925.65,3279.65)
IN4: J3.4 U1.28 | length 1875.8
  Top Layer w10: U1.28 3945.33,3300.79 3945.44,3300.91 v1(3971.23,3300.91)
  Bottom Layer w10: J3.4 2685.38,3545 3198,3545 3346,3693 3969,3693 3984,3678 3984,3314.16 3971.23,3301.4 v1(3971.23,3300.91)
LSE_IN: C17.2 U1.3 X2.1 | length 332.1
  Top Layer w10: X2.1 3399.21,3359.21 3458.9,3418.9 U1.3
  Top Layer w20: C17.2 3224.92,3359.61 3339.61,3359.61 X2.1
LSE_OUT: C18.2 U1.4 X2.2 | length 408.6
  Top Layer w10: X2.2 3390.79,3260.79 3421,3291 3421,3355 3465.21,3399.21 U1.4
  Top Layer w20: C18.2@3224.53,3250 3224.53,3253.94 3230.28,3259.69 3234.21,3259.69 3235.32,3260.79 X2.2
MPU_SCL: R6.1 U1.42 U3.23 | length 777.5
  Top Layer w10: U1.42 3699.84,3559.96 3712.89,3573 4137,3573 4195,3515 4195,3474.86 4200.86,3469 4236.47,3469 4237.36,3468.11 4237.36,3354.65 U3.23
MPU_SDA: R5.1 U1.43 U3.24 | length 987.6
  Top Layer w10: U1.43 3680.16,3561.48 3706.67,3588 4149,3588 ; v3(4151,3487) 4151,3481 4188,3444 4188,3435 4215.79,3407.21 U3.24 ; v3(4153.33,3629.14) 4149,3624.81 4149,3588 ; R5.1 4237.47,3552 4185,3552 4149,3588
  Bottom Layer w10: v3(4151,3487) 4151,3626.81 v3(4153.33,3629.14)
Net_1: ?.1 ?.2 ?.3 ?.4 R10.2 | length 3694.1
  Top Layer w10: R10.2 3900.9,2870 3888.25,2857.35 3888.25,2441.86 3898.11,2432 4788,2432 4817,2461 4817,2950 4803,2964 4803,2971.49 4773.55,3000.94 ?.3 4762.87,2999.96 4646.73,2999.96 ?.1@4645.75,2998.98 ; ?.2@4645.75,3358.82 4646.73,3357.83 4762.87,3357.83 ?.4
  Bottom Layer w10: ?.1@4645.75,3000.94 4640,2995.2 4640,2942 ; ?.3 4751,2988.09 4751,2947.86 4745.14,2942 4640,2942 ; ?.4 4763.86,3430.14 4758,3436 4644.86,3436 4639,3430.14 4639,3363.6 4645.75,3356.85 4527.85,3356.85 4371,3200 4371,3018 4447,2942 4640,2942
Net_A5: ?.A5 R8.2 | length 765.4
  Top Layer w10: R8.2 4175,2780 4193,2798 4193,2890 4207,2904 4403,2904 4405,2906 4405,3027 4432,3054 4567.79,3054 4593,3079.21 4593,3096 4606.09,3109.09 4629.09,3109.09 ?.A5
Net_B5: ?.B5 R7.2 | length 1123.1
  Top Layer w10: R7.2 4125.91,2719.09 4115,2730 4057,2730 4036,2751 4036,2806.14 4041.86,2812 4154,2812 4169,2827 4169,2911 4192,2934 4335.14,2934 4341,2939.86 4341,3049 v1@4397,3105 ; v1(4397,3191) 4434.11,3228.11 ?.B5
  Bottom Layer w10: v1(4397,3191) 4397,3190.51 4398,3189.51 v1(4398,3107)
NetC13_2: C13.2 U3.20 | length 244.1
  Top Layer w10: U3.20 4294.53,3381.67 4300.39,3387.53 4379.53,3387.53 4421,3429 4421,3441.67 4426.86,3447.53 C13.2
NetC15_2: C15.2 U3.10 | length 319.9
  Top Layer w10: v1@4093.08,3153.86 C15.2 ; U3.10 4275.31,3196.78 4275.31,3149.25 v1(4275.65,3148.91)
  Bottom Layer w10: v1(4094,3153) 4094.49,3153 4099.49,3148 4186.87,3148 4187.78,3148.91 v1(4275.65,3148.91)
NetD1_K: D1.K R2.2 | length 87.1
  Top Layer w10: R2.2 4252.89,2862.42 4252.89,2782.58 D1.K
NetD2_K: D2.K R3.2 | length 90.2
  Top Layer w12: D2.K 3341.89,3018.58 3341.89,2932.42 R3.2
NetD3_K: D3.K R9.2 | length 81.9
  Top Layer w10: D3.K R9.2
NetR1_2: R1.2 SW2.2 | length 1732.3
  Top Layer w20: R1.2 3165,3165.47 3165,3198.28 3176.72,3210 3290.08,3210 3304.22,3195.86 3304.22,3185.9 3327,3163.12 v3(3327,3155) ; v3(3338,3628) 3339.28,3628 3531.28,3820 3690,3820 3725,3855 SW2.2
  Bottom Layer w20: v3(3327,3155) 3332.5,3160.5 3332.5,3622.5 v3(3338,3628)
nRST: C8.2 SW1.2 U1.7 | length 2048.4
  Top Layer w10: v1(3096,3144) 3120,3120 3194.14,3120 3200,3114.14 3200,2823 3223,2800 3407,2800 v2(3409,2798) ; v1@3483,3340 3483.16,3340.16 U1.7 ; SW1.2 3530.69,2943.01 v2(3530.69,2795.96)
  Top Layer w12: SW1.2 3528.7,3036.7 3539,3047 3862.97,3047 3870,3039.97 C8.2
  Bottom Layer w10: v1@3096,3145 v1(3096,3144) 3096,3138 3114,3120 3422.59,3120 3446,3143.41 3446,3200.21 3441.09,3205.12 3441.09,3274.8 3445,3278.71 3445,3317 3455.91,3327.91 3471.42,3327.91 3483.51,3340 v1(3484,3340) ; v2(3409,2798) 3528.64,2798 v2(3530.69,2795.96)
OLED_SCL: J1.3 U1.21 | length 1750
  Top Layer w10: J1.3 2949.47,2410.47 v1@2950,2411 ; v1(3739,3125) 3739.13,3125.13 3739.13,3191.46 U1.21
  Bottom Layer w10: v1(2950,2410) 3699,2410 3790,2501 3790,3116 3781,3125 v1(3739,3125)
OLED_SDA: J1.2 U1.22 | length 1644.8
  Top Layer w10: J1.2 2947.47,2469.53 v1@2948,2469 ; U1.22 3758.9,3100.1 v1@3759,3100
  Bottom Layer w10: v1(2948,2470) 3720,2470 3764,2514 3764,3091.51 3759,3096.51 v1(3759,3097)
PC13: D2.A U1.2 | length 516.5
  Top Layer w10: D2.A 3399.53,3116.53 3400.13,3117.13 3400.13,3120.04 v1(3417,3136.91) ; v1@3475.58,3438.58 U1.2
  Bottom Layer w10: v1(3417,3136.91) 3417,3137.4 3431,3151.4 3431,3194 3419.14,3205.86 3419.14,3356.14 3476,3413 v1(3476,3439)
PSU_5V: J4.1 P3.1 | length 1604.8
  Top Layer w20: P3.1 2652,2762 2542,2762 2527,2747 2527,2120 2563,2084 2700,2084 2842,1942 3202.97,1942 3214.68,1953.72 3214.68,2015.24 3224.37,2024.92 J4.1@3226,2026.55
RED: J2.2 U1.29 | length 1840.8
  Top Layer w10: J2.2 3109.53,3913.47 3306,3717 v1(3356,3717) ; U1.29 v1(3923.47,3320.47)
  Bottom Layer w10: v1(3356,3717) 3667.25,3717 3674.25,3724 3985,3724 3999,3710 3999,3304.23 3979.77,3285 3958.95,3285 v1(3923.47,3320.47)
SWCLK: P1.3 U1.37 | length 2807.6
  Top Layer w10: U1.37 3798.27,3552.14 3804.13,3558 3915.4,3558 3916.49,3556.9 v1(3916.98,3556.9) ; P1.3 v1(4150,2021)
  Bottom Layer w10: v1(3916.98,3556.9) 3917,3631.14 3895.14,3653 3474.79,3653 3454,3632.21 3454,3504.79 3715.79,3243 3830,3243 3915,3158 3915,2644.29 4150,2409.29 v1(4150,2021)
SWDIO: P1.2 U1.34 | length 2869.6
  Top Layer w10: U1.34 3907.41,3418.9 3918.51,3430 v1(3919,3430) ; v1@4248,2026 v1(4250,2024) P1.2
  Bottom Layer w10: v1(3919,3430) 3920,3431 3920,3484 3889.46,3514.54 3889.46,3632.14 3883.61,3638 3486.86,3638 3469,3620.14 3469,3511 3718,3262 3843,3262 3930,3175 3930,2650.5 4172,2408.5 4172,2052 4200,2024 v1(4250,2024)
USB_N: ?.A7 ?.B7 U1.32 | length 1334.2
  Top Layer w10: U1.32 3952.74,3379.53 3995.21,3422 4136.14,3422 4142,3416.14 4142,3145 4169,3118 4305.21,3118 4307.21,3120 4310,3120 4333,3143 4546,3143 ; v1(4546,3103) 4546,3143 ; v1(4546,3208) 4546.43,3208.43 ?.A7 ; ?.B7 4593.06,3169.06 4567,3143 4546,3143
  Bottom Layer w10: v1(4546,3103) v1(4546,3208)
USB_P: ?.A6 ?.B6 U1.33 | length 1552.4
  Top Layer w10: U1.33 3951.21,3399.21 3989,3437 4147.54,3437 4158,3426.54 4158,3150.21 4175.21,3133 4299,3133 4324,3158 4515,3158 ; v1(4445,3110) 4445,3081.97 4450.86,3076.11 4564.14,3076.11 4570,3081.97 4570,3117 4601.46,3148.46 4629.09,3148.46 ?.A6 ; v1(4516,3189) 4516,3159 4515,3158 ; ?.B6 4616.22,3188.74 4612.44,3184.96 4587.75,3184.96 4560.79,3158 4515,3158
  Bottom Layer w10: v1(4445,3110) 4445,3183.14 4450.86,3189 v1(4516,3189)
pads on no net: ?.A8 ?.B8 J1.5 J1.6 J2.5 J2.6 J4. J4.3 J4.4 P3.3 SW2.MH U1. U1.14 U1.15 U1.16 U1.17 U1.18 U1.20 U1.25 U1.38 U1.39 U1.40 U1.41 U1.45 U1.46 U3.2 U3.3 U3.4 U3.5 U3.6 U3.7 U3.9 U3.11 U3.12 U3.14 U3.15 U3.16 U3.17 U3.19 U3.21 U3.22 U3.25
copper on no net:
  other v3: 3899,3800
  other v4: 4243.35,3253.35 4286.65,3253.35 4243.35,3296.65 4286.65,3296.65

## Polygon pours and split planes (outlines as drawn)
GND on Top Layer "GND_L01_P010" (solid, pour order 10): 2595,4501 2596,4500 4717,4500 4718,4501 4733,4501 4740,4494 4751,4490 4774,4479 4790.36,4464.64 4823,4432 4829,4413 4839,4392 4840,4355 4839,4334 4840,1905 4832,1862 4819,1837 4790,1804 4768,1788 4726,1776 4652,1774 3643,1774 3392,1776 2625,1775 2588,1780 2551,1799 2516,1835 2494,1881 2495,1939 2495,2959 2493,4023 2495,4404.64 2506,4454 2527,4472 2547,4486 2595,4502
3V3 on Top Layer "3V3_L01_P004" (solid, pour order 4): 4276,3592 4340,3592 4340,3424 4331,3415 4279,3415 4279,3592 4275,3596
3V3 on Top Layer "3V3_L01_P002" (solid, pour order 2): 4277,2558 4466,2558 4468,2560 4468,2637 4292,2637 4277,2622
5V on Top Layer "5V_L01_P003" (solid, pour order 3): 4388,2813 4388,2743 4335,2690 4206,2690 4206,2637 4181,2612 4181,2557 4251,2557 4254,2560 4254,2637 4331,2637 4434,2740 4439,2740 4439,2790 4437,2792 4447,2802 4515,2802 4515,2873 4514,2872 4447,2872
3V3 on Top Layer "3V3_L01_P001" (solid, pour order 1): 4529,2903 4580,2903 4599,2922 4599,2944 4786,2944 4803,2927 4803,2498 4463,2498 4451,2510 4451,2619 4663,2619 4669,2613 4717,2661 4717,2921 4715,2923 4701,2909 4629,2909 4629,2908 4590,2869 4590,2818 4535,2818 4529,2824
GND on Bottom Layer "GND_L02_P011" (solid, pour order 11): 2495,4404.64 2492,1893 2497,1868 2505,1858 2508,1845 2516,1835 2539.64,1810.36 2551,1799 2588,1780 2625,1775 2680,1775 4726,1776 4768,1788 4790,1804 4819,1837 4832,1862 4842,1895 4841,1916 4842,4382 4834,4402.5 4823,4432 4797.5,4457.5 4774,4479 4740,4494 4717.5,4500.5 4683,4500 2584,4500 2558,4494 2537,4479 2516.5,4463 2500,4444

## Silkscreen, mask and mechanical layers (free items; w line width, h text height)
Top Overlay:
  drawing of 11 lines, arcs and shapes, not listed
  text "1" at 3600,4190 h50
  text "0" at 3825,4185 h50
  text "RGB" at 3170,4045 h50
  text "IN1" at 2850,3985 h50
  text "IN2" at 2845,3830 h50
  text "v1.0" at 4585,3747 h60
  text "IN3" at 2850,3680 h50
  text "IN4" at 2845,3515 h50
  text "ENA" at 2850,3350 h50
  text "ENB" at 2855,3175 h50
  text "3V3" at 2806,3049 h50
  text "NC" at 2809,2934 h50
  text "5V" at 2811,2833 h50
  text "RST" at 3634,2796 h60
  text "P_5V" at 2813,2734.33 h50
  text "OLED" at 2950,2215 h50 r90
  text "5V" at 3010,2120 h50
  text "VCC" at 3860,2005 h50 r90
  text "RX" at 3750,2000 h50 r90
  text "GND" at 3510,1995 h50 r90
  text "TX" at 3640,1990 h50 r90
  text "CLK" at 4175,1985 h50 r90
  text "IO" at 4290,1985 h50 r90
  text "GND" at 4390,1985 h50 r90
  text "VCC" at 4065,1980 h50 r90
Mechanical 1:
  lines w10: 2495,1904.5 ccw(c2614.5,1904.5) 2530,1820 2539.64,1810.36 ccw(c2625,1895.71) 2625,1775 4710.5,1775 ccw(c4710.5,1894.5) 4795,1810 4804.64,1819.64 ccw(c4719.29,1905) 4840,1905 4840,4365 ccw(c4719.29,4365) 4804.64,4450.36 4790.36,4464.64 ccw(c4705,4379.29) 4705,4500 2604.5,4500 ccw(c2604.5,4380.5) 2520,4465 ccw(c2580.36,4404.64) 2495,4404.64 2495,4365 2495,1904.5

## Text inside footprints (layer, text, board x,y; h text height)
D1: Mechanical 13 "+" at 4336.84,2803.96 h19.68
D2: Mechanical 13 "+" at 3421.84,3043.96 h19.68
D3: Mechanical 13 "+" at 4183.16,2979.18 h19.68 r180